# EAGLE board vichaarak (EAGLE 9.6.2)
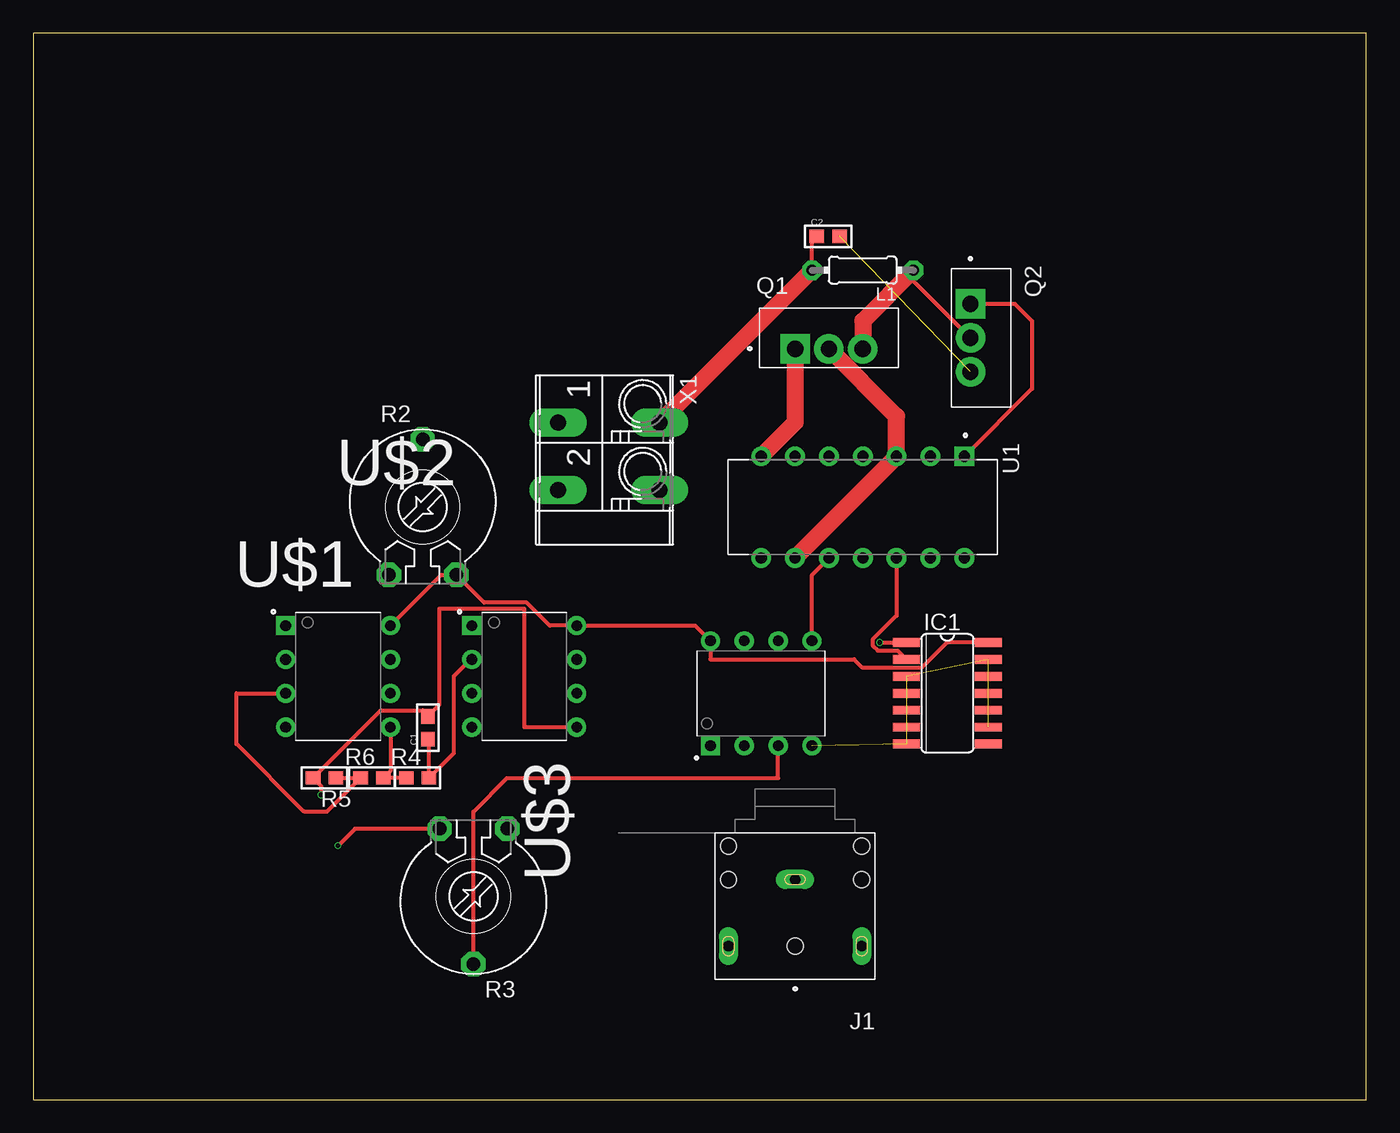
[diagram p0: board, top side]
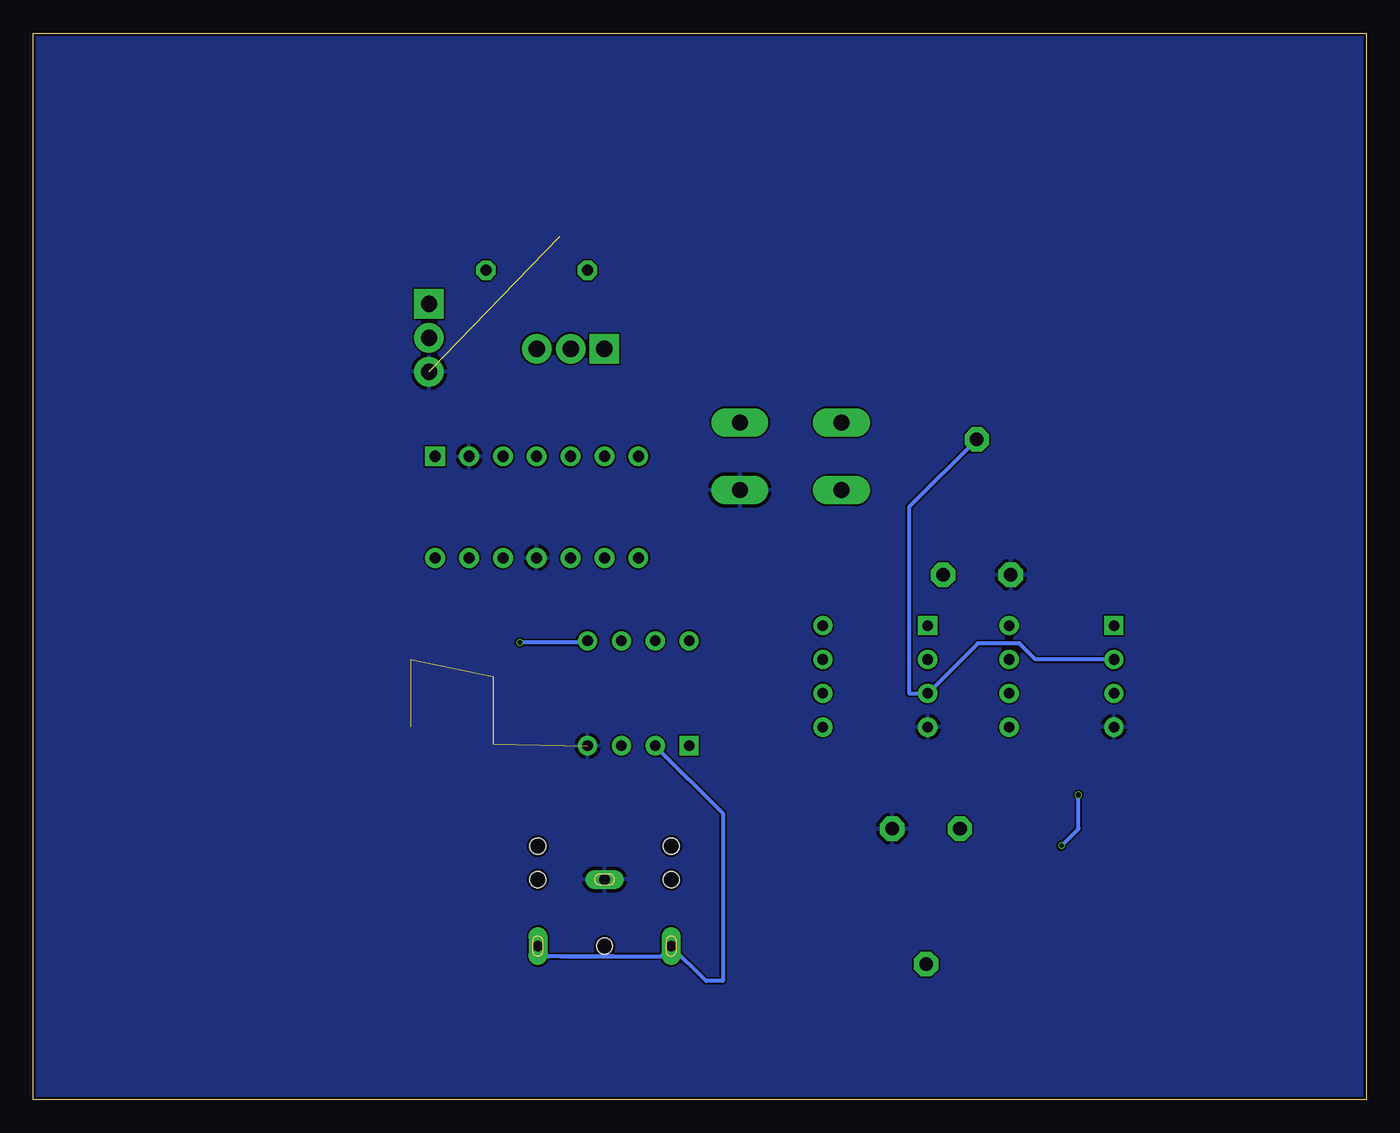
[diagram p1: board, bottom side, seen from below]

Size 100 x 80 mm. Coordinates in mm from the lower left corner, seen from the top.
Outline: 0,0 100,0 100,80 0,80 0,0
Copper layers (1*16): Top 0.035mm / dielectric 1.6mm / Bottom 0.035mm
Design rules "jlcpcb-2layers": minimum track width 5mil, minimum drill 0.3mm, track to track 5mil, track to pad 5mil, pad to pad 5mil, via to via 5mil, smd to smd 5mil, copper to edge 0.2mm, drill to drill 6mil, minimum pad ring 10mil, minimum via ring 3mil, stop-mask expansion 4mil, vias tented up to drill 0mil, thermal gap 10mil

## Footprints (pad centres in the part's own frame; a part is rotated, then mirrored left to right if it is on the bottom)
C0603 = smd 1.1 x 1: 1 -0.909,0; 2 0.809,0
SO14 = smd 0.66 x 2.032: 1 -3.81,-3.073; 2 -2.54,-3.073; 3 -1.27,-3.073; 4 0,-3.073; 5 1.27,-3.073; 6 2.54,-3.073; 7 3.81,-3.073; 8 3.81,3.073; 9 2.54,3.073; 10 1.27,3.073; 11 0,3.073; 12 -1.27,3.073; 13 -2.54,3.073; 14 -3.81,3.073
CUI_SJ1-3523N = drill 0.8 long: 1 0,0; 2 5,5; 3 -5,5 | hole 1.2: -5,-2.5; -5,0; 0,5; 5,-2.5; 5,0
0204/7 = drill 0.813 octagon: 1 -3.81,0; 2 3.81,0
TO254P1054X469X1930-3 = drill 1.23 square: 1 -2.54,-0.81 | drill 1.23: 2 0,-0.81; 3 2.54,-0.81
PT-10 = drill 1.016 octagon: A -2.54,-5.08; E 2.54,-5.08; S 0,5.08
R0603 = smd 1.1 x 1: 1 -0.85,0; 2 0.85,0
DIP762W45P254L2019H533Q14 = drill 0.83 pad 1.25 square: 1 -3.81,7.62 | drill 0.83 pad 1.25: 2 -3.81,5.08; 3 -3.81,2.54; 4 -3.81,0; 5 -3.81,-2.54; 6 -3.81,-5.08; 7 -3.81,-7.62; 8 3.81,-7.62; 9 3.81,-5.08; 10 3.81,-2.54; 11 3.81,0; 12 3.81,2.54; 13 3.81,5.08; 14 3.81,7.62
DIP787W46P254L927H533Q8 = drill 0.8 square: 1 -3.935,3.81 | drill 0.8: 2 -3.935,1.27; 3 -3.935,-1.27; 4 -3.935,-3.81; 5 3.935,-3.81; 6 3.935,-1.27; 7 3.935,1.27; 8 3.935,3.81
FFKV2 = drill 1.194 long: 1 -2.54,-3.81; 1A -2.54,3.81; 2 2.54,-3.81; 2A 2.54,3.81

## Placement (x,y rotation side)
C1  10nF  [C0603]  29.59,27.94 90 top
C2  1uF  [C0603]  59.69,64.77 0 top
IC1  7404D  [SO14]  68.58,30.48 270 top
J1  SJ1-3523N  [CUI_SJ1-3523N]  57.15,16.51 180 top
L1  16.5uH  [0204/7]  62.23,62.23 180 top
Q1  IRF540N  [TO254P1054X469X1930-3]  59.69,57.15 0 top
Q2  IRF540N  [TO254P1054X469X1930-3]  71.12,57.15 270 top
R2  20K  [PT-10]  29.21,44.45 0 top
R3  1K  [PT-10]  33.02,15.24 180 top
R4  1K  [R0603]  28.83,24.13 0 top
R5  47K  [R0603]  21.84,24.13 180 top
R6  100K  [R0603]  25.4,24.13 0 top
U1  IR2110  [DIP762W45P254L2019H533Q14]  62.23,44.45 270 top
U$1  MCP602-I/P  [DIP787W46P254L927H533Q8]  22.86,31.75 0 top
U$2  MCP602-I/P  [DIP787W46P254L927H533Q8]  36.83,31.75 0 top
U$3  MCP602-I/P  [DIP787W46P254L927H533Q8]  54.61,30.48 90 top
X1  FFKV2  [FFKV2]  43.18,48.26 270 top

## Library data of the parts
C1 C2 = PC_Capacitor_0603; AVAILABILITY: Good; DESCRIPTION: 0.1µF ±10% 50V Ceramic Capacitor X7R 0603 (1608 Metric); MF: TDK; MP: CGA3E2X7R1H104K080AA; PACKAGE: 1608 TDK; PRICE: None; PURCHASE-URL: https://pricing.snapeda.com/search/part/CGA3E2X7R1H104K080AA/?ref=eda
IC1 = 74xx-us
J1 = SJ1-3523N; AVAILABILITY: In Stock; CHECK_PRICES: https://www.snapeda.com/parts/SJ1-3523N/Same+Sky/view-part/?ref=eda; DESCRIPTION: 3.5 mm, Stereo, Right Angle, Through Hole, 3 Conductors, 0 Internal Switches, Audio Jack Connector; MF: Same Sky; MP: SJ1-3523N; PACKAGE: None; PRICE: None; SNAPEDA_LINK: https://www.snapeda.com/parts/SJ1-3523N/Same+Sky/view-part/?ref=snap
L1 = rcl; SPICEPREFIX: L
Q1 Q2 = IRF540N; AVAILABILITY: In Stock; CHECK_PRICES: https://www.snapeda.com/parts/IRF540N/Infineon/view-part/?ref=eda; DESCRIPTION: Transistor NPN MOS IRF540/IRF540N INTERNATIONAL RECTIFIER Ampere=28 V=100 TO220; MF: Infineon Technologies; MP: IRF540N; PACKAGE: Package; PRICE: None; SNAPEDA_LINK: https://www.snapeda.com/parts/IRF540N/Infineon/view-part/?ref=snap
R2 R3 = pot
R4-R6 = PC_Resistor_0603; MF: Yageo; RESISTOR: 0603
U1 = IR2110; AVAILABILITY: In Stock; CHECK_PRICES: https://www.snapeda.com/parts/IR2110/Infineon/view-part/?ref=eda; DESCRIPTION: Half-Bridge Gate Driver IC Non-Inverting 14-PDIP; MF: Infineon; MP: IR2110; PACKAGE: DIP-14 International Rectifier; PRICE: None; SNAPEDA_LINK: https://www.snapeda.com/parts/IR2110/Infineon/view-part/?ref=snap
U$1-U$3 = MCP602-I_P; AVAILABILITY: In Stock; CHECK_PRICES: https://www.snapeda.com/parts/MCP602-I/P/Microchip+Technology/view-part/?ref=eda; DESCRIPTION: Microchip MCP602-I/P,Dual Op Amp,2.8MHz CMOS,Rail to Rail,3V,5V,8-Pin PDIP | Microchip Technology Inc. MCP602-I/P; MF: Microchip Technology; MP: MCP602-I/P; PACKAGE: DIP-8 Microchip; PRICE: None; SNAPEDA_LINK: https://www.snapeda.com/parts/MCP602-I/P/Microchip+Technology/view-part/?ref=snap
X1 = con-phoenix-508; OC_FARNELL: unknown; OC_NEWARK: unknown

## Nets
+5V: IC1.14 R2.E U$1.8 U$2.8 U$3.8
+12V: Q1.2 U1.3 U1.9
GND: C2.2 IC1.3 IC1.5 IC1.7 IC1.9 IC1.11 IC1.13 J1.1 Q2.3 R2.A R3.A U1.2 U1.11 U$1.4 U$2.4 U$3.4 X1.2A
N$1: R2.S U$1.2 U$2.3
N$2: R5.1 R6.1 U$1.3
N$3: C1.2 R3.E R5.2 U$2.5
N$4: R4.1 R6.2 U$1.5
N$5: C1.1 R4.2 U$2.2
N$7: R3.S U$3.3
N$8: J1.2 J1.3 U$3.2
N$9: IC1.2 U1.12
N$10: IC1.1 U1.10 U$3.5
N$11: L1.1 Q1.3 Q2.2
N$12: Q1.1 U1.7
N$13: Q2.1 U1.1
N$14: C2.1 L1.2 X1.1A
VSS: U1.13

## Tracks (layer width: path | path; a pad name or v marks a point on that pad's centre or on a via)
+5V
  Top 0.305: U$1.8 30.61,39.37 R2.E 33.83,37.29 37.02,37.29 38.75,35.56 U$2.8 49.66,35.56 U$3.8 50.8,33.02 61.58,33.02 62.22,32.38 66.65,32.38 68.55,34.29 IC1.14
+12V
  Top 1.27: Q1.2 64.77,51.26 U1.3 U1.9
GND  (7 unrouted)
  Top 0.305: 33.02,27.82 U$2.4
  Bottom 0.305: 32.9,28.07 U$2.4
  pour Bottom: 0,80.01 100.33,80.01 100.33,0 0,0
N$1
  Bottom 0.305: U$1.2 24.8,33.02 26.02,34.23 29.14,34.23 U$2.3 34.29,30.48 34.29,44.45 R2.S
N$2
  Top 0.305: R5.1 R6.1 22.01,21.59 20.32,21.59 15.24,26.67 15.24,30.48 U$1.3
N$3  (via drill 0.35)
  Top 0.305: R3.E 24.13,20.32 v22.86,19.05 | v21.59,22.86 21.59,23.53 R5.2 26.07,29.21 29.21,29.21 29.59,28.83 C1.2 30.48,29.64 30.48,36.83 36.83,36.83 36.83,27.94 U$2.5
  Bottom 0.305: v22.86,19.05 21.59,20.32 v21.59,22.86
N$4
  Top 0.305: U$1.5 26.8,24.68 26.46,24.34 | 26.46,24.34 R6.2 | R4.1 26.67,24.13 26.46,24.34
N$5
  Top 0.305: C1.1 29.68,26.94 R4.2 31.55,26.01 31.55,31.77 32.81,33.02 U$2.2
N$7
  Top 0.305: R3.S 33.02,21.59 35.56,24.13 55.88,24.13 U$3.3
N$8
  Bottom 0.305: U$3.2 48.26,21.46 48.26,8.89 49.53,8.89 J1.2 52.92,10.74 60.38,10.74 | 56.42,10.74 61.38,10.74 J1.3
N$9
  Top 0.305: IC1.2 64.85,33.68 63.36,33.68 62.97,34.07 62.97,34.51 64.77,36.31 U1.12
N$10  (via drill 0.35)
  Top 0.305: v63.5,34.29 IC1.1 | U$3.5 58.42,39.37 U1.10
  Bottom 0.305: U$3.5 58.55,34.29 v63.5,34.29
N$11
  Top 0.305: Q2.2 66.04,61.42 L1.1
  Top 1.27: L1.1 62.23,58.42 Q1.3
N$12
  Top 1.27: U1.7 57.15,50.8 Q1.1
N$13
  Top 0.305: U1.1 74.93,53.34 74.93,58.42 73.66,59.69 Q2.1
N$14
  Top 0.305: L1.2 58.42,64.41 C2.1
  Top 1.27: X1.1A L1.2